# Altium PCB STLinkV2_1.PcbDoc (part 1 of 2)
Units mm, origin at the board's own origin, x right, y up, seen from the top; angles counter-clockwise.
Board outline 37 x 14 mm, 4 copper layers (Top Layer, GND, Layer 2, Bottom Layer), stack 1.587 mm thick; 49 components, 42 nets, 180 pads, 75 vias.
Unrouted connection lines stored in the file: 1.
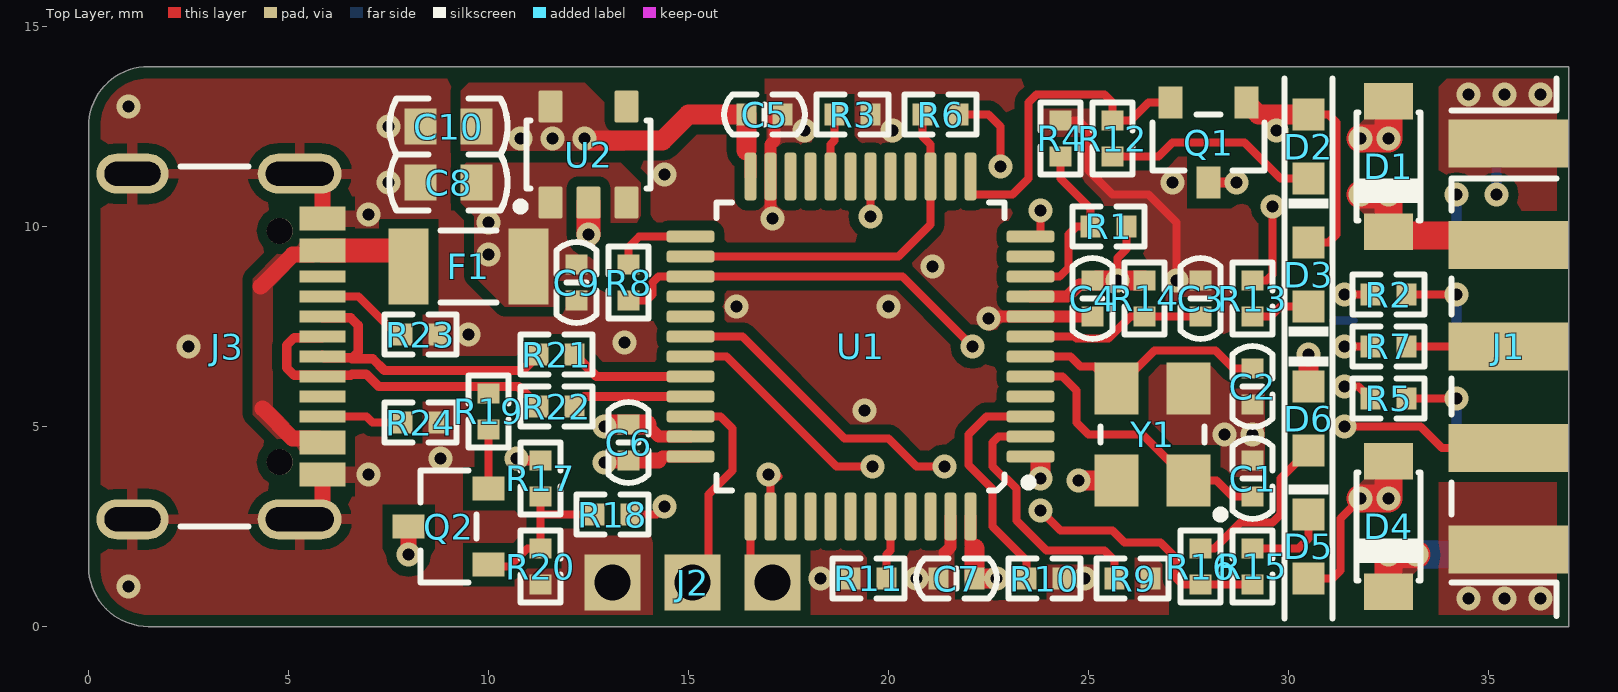
[diagram p0: Top Layer view]
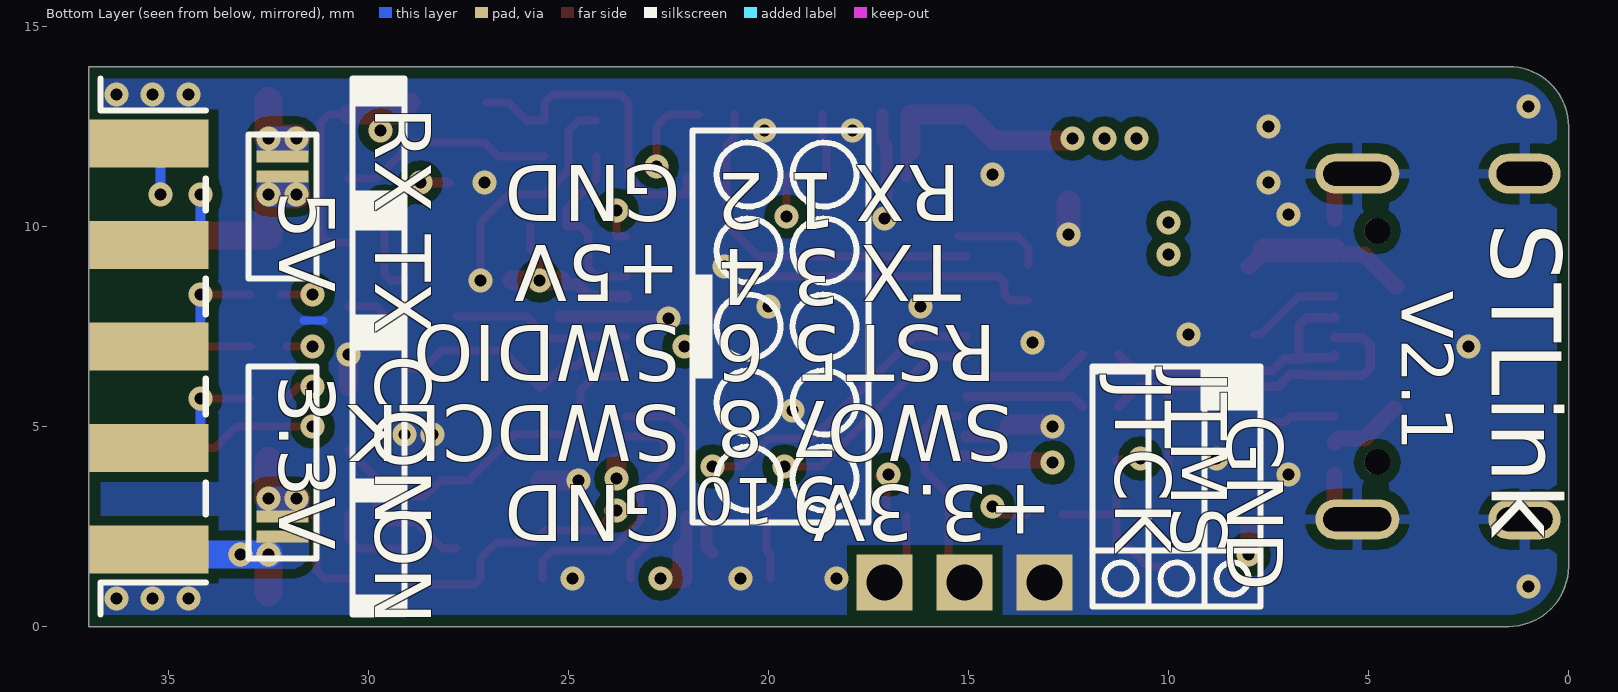
[diagram p1: Bottom Layer view, seen from below]
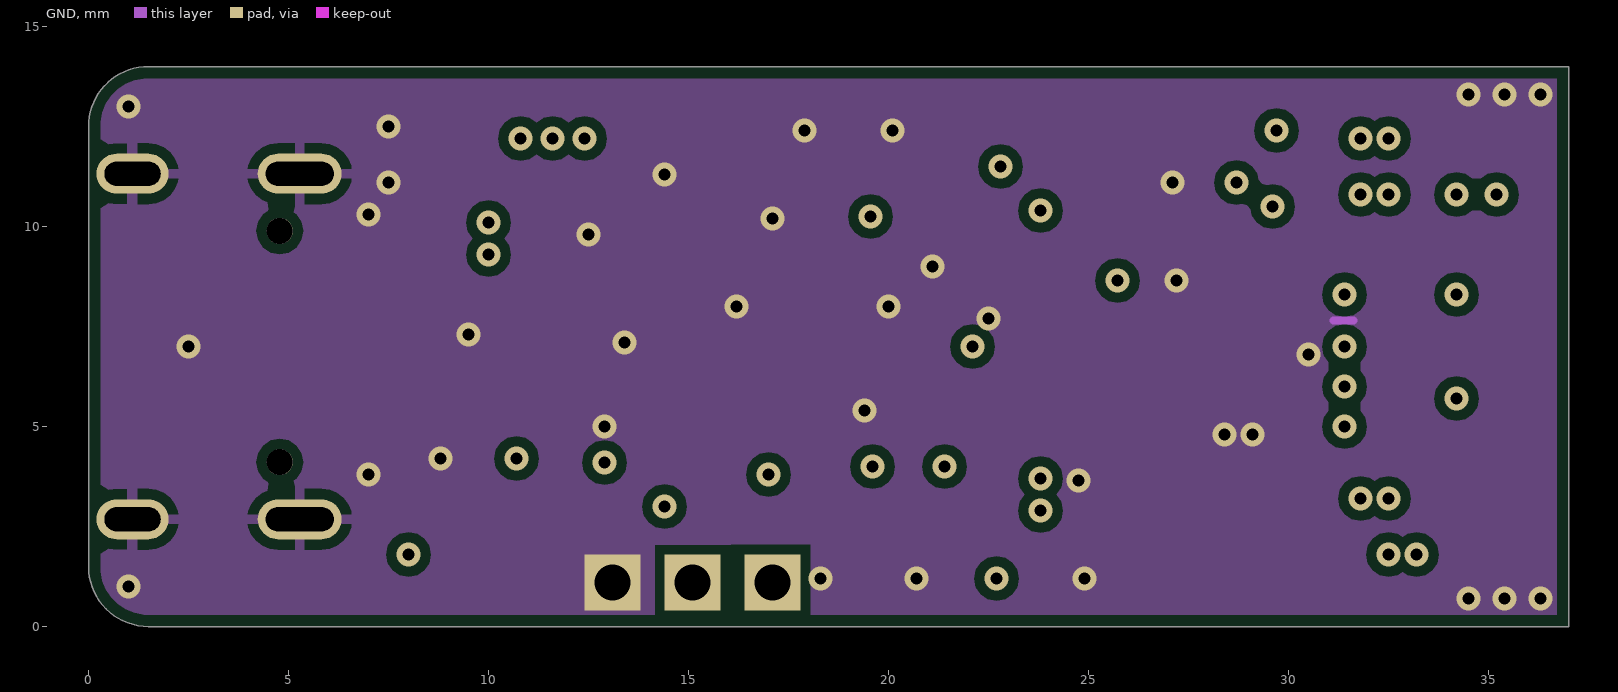
[diagram p2: GND]
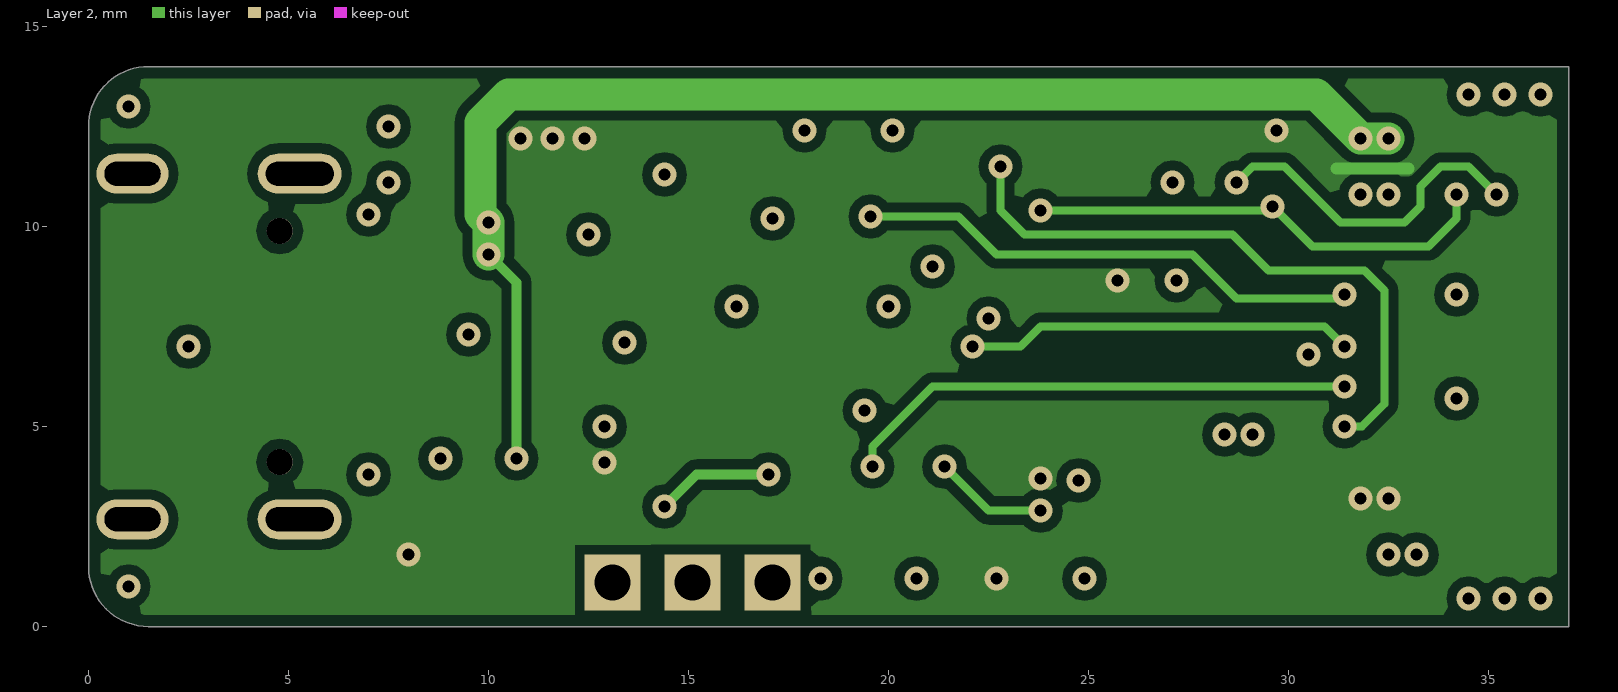
[diagram p3: Layer 2]
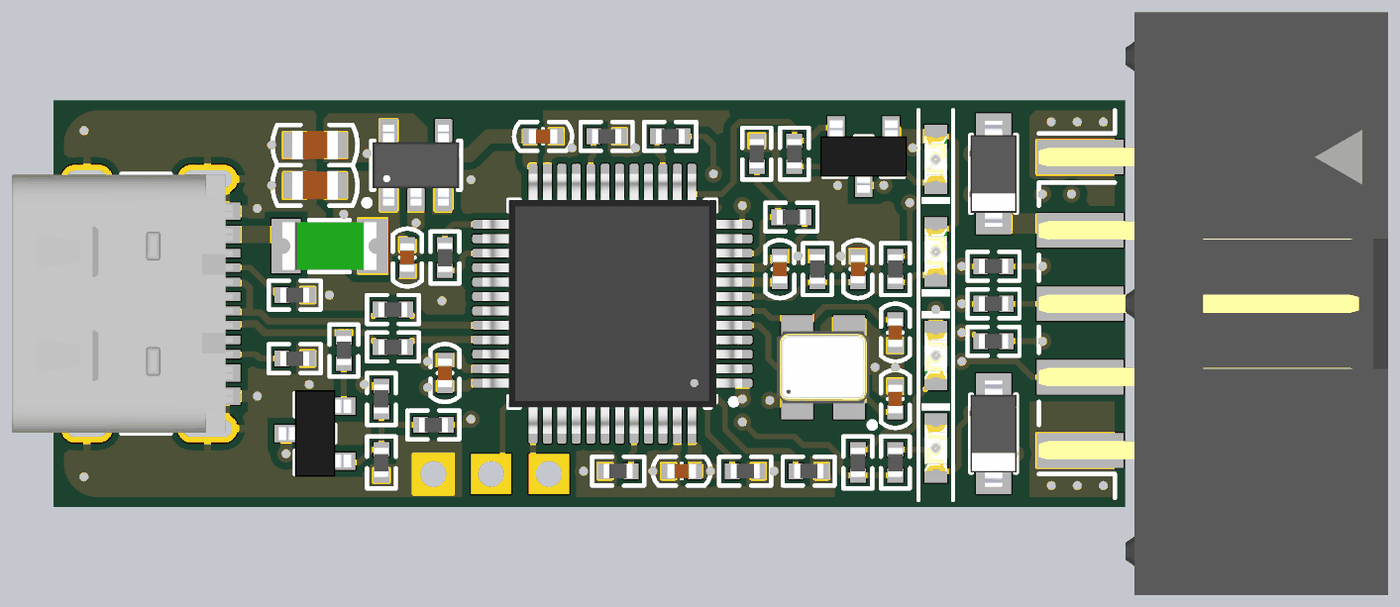
[diagram p4: 3D render of the assembled board from above, using the file's embedded part models]

## Layer stack, top to bottom
Top Solder: solder mask 0.0102, Solder Resist, Dk 3.5
Top Layer: signal copper 0.0356
Dielectric 2: prepreg 0.21, PP-006, Dk 4.4
GND: signal copper 0.0152
Dielectric 1: dielectric 1.065, FR-4, Dk 4.6
Layer 2: signal copper 0.0152
Dielectric 3: prepreg 0.21, PP-006, Dk 4.4
Bottom Layer: signal copper 0.0356
Bottom Solder: solder mask 0.0102, Solder Resist, Dk 3.5

## Board outline
0,1.5 ccw(c1.5,1.5) 1.5,0 37,0 37,14 1.5,14 ccw(c1.5,12.5) 0,12.5

## Design rules (kind name [scope] priority, off if disabled: settings)
Clearance Clearance_1 [InNet('+3V3_PIN')] p1 off: gap=0.2 ignorepadtopadclearanceinfootprint=FALSE except(0.1: Arc-THPad Arc-Hole Track-THPad Track-Hole SMDPad-THPad; 0.15: Arc-Arc Arc-Track Track-Track SMDPad-Hole Fill-Hole Poly-Hole Region-Hole)
Clearance [All] p2: gap=0.25 ignorepadtopadclearanceinfootprint=FALSE except(0.1: Arc-THPad Arc-Hole Track-THPad Track-Hole SMDPad-THPad; 0.15: Arc-Arc Arc-Track Track-Track SMDPad-Hole Fill-Hole Poly-Hole Region-Hole; 0.2: Arc-SMDPad Arc-Via Arc-Text Track-SMDPad Track-Via Track-Text SMDPad-SMDPad SMDPad-Via SMDPad-Text THPad-THPad THPad-Via THPad-Text THPad-Hole Via-Via Via-Text Via-Hole Fill-Text Poly-Text Region-Text Text-Text Text-Hole)
ComponentClearance [All] p1: gap=-10 collisioncheckmode=3 verticalgap=-10 showdistances=FALSE
DiffPairsRouting [All] p1: maxlimit=0.15 minlimit=0.127 mostfreqgap=0.15 toplayer_minwidth=0.236 toplayer_maxwidth=0.264 toplayer_prefwidth=0.264 midlayer1_maxgap=0.127 midlayer1_prefgap=0.127 midlayer1_minwidth=0.148 midlayer1_maxwidth=0.148 midlayer1_prefwidth=0.148 midlayer2_maxgap=0.127 midlayer2_prefgap=0.127 midlayer2_minwidth=0.148 midlayer2_maxwidth=0.148 midlayer2_prefwidth=0.148 bottomlayer_minwidth=0.236 bottomlayer_maxwidth=0.264 bottomlayer_prefwidth=0.264 impedanceprofiledriven=TRUE impedanceprofileid={6837B7C3-B196-4AB3-86C8-2EA95904B1C1} impedanceprofilevalue=90.000000 maxuncoupledlength=12.7
PlaneConnect [All] p1: planeconnectstyle=Direct reliefexpansion=0.508 reliefentries=4 reliefconductorwidth=0.254 reliefairgap=0.254
PolygonConnect [All] p1: connectstyle=Direct reliefconductorwidth=0.254 reliefentries=4 polygonreliefangle="90 Angle" airgapwidth=0.254
RoomDefinition [02]-STLinkV2_1 [InComponentClass('[02]-STLinkV2_1')] p1: confinementstyle=ConfineIn formatcopy=TRUE lockcomponents=FALSE outline -221,-158 -170.2,-158 -170.2,-132.6 -221,-132.6
RoutingVias [All] p1: holewidth=0.3 width=0.6 viastyle="Through Hole" minholewidth=0.1 minwidth=0.2 maxholewidth=6 maxwidth=10
SilkToSilkClearance [All] p1: silktosilkclearance=0.15
SilkToSolderMaskClearance [IsPad] p1: minsilkscreentomaskgap=0.1 clearancetoexposedcopper=TRUE
SolderMaskExpansion [All] p1: expansion=0.05
Width [All] p1: maxlimit=10 minlimit=0.1 preferedwidth=0.2 minimp=50.000000 maximp=50.000000 favimp=50.000000
25 further rules are at their usual default settings.

## Classes and differential pairs
differential pair class DIFF_USB: USB
differential pair class USB: J USB
differential pair J: +J_P -J_N
differential pair USB: +USB_P -USB_N

## Components (designator, comment, footprint, x,y, rotation, side; value= is the part's Value field where it differs from the comment)
C1 "10pF" CAPC1005X55N 29.1,3.7 r270 top
C2 "10pF" CAPC1005X55N 29.1,6 r90 top
C3 "100n" CAPC1005X55N 27.8,8.2 r90 top
C4 "100n" CAPC1005X55N 25.1,8.2 r270 top
C5 "100n" CAPC1005X55N 16.9,12.8 r0 top
C6 "100n" CAPC1005X55N 13.5,4.6 r90 top
C7 "100n" CAPC1005X55N 21.7,1.2 r180 top
C8 "10u" CAPC0603(1608METRIC)L 9,11.1 r180 top
C9 "100n" CAPC1005X55N 12.2,8.6 r270 top
C10 "10u" CAPC0603(1608METRIC)L 9,12.5 r180 top
D1 "MBR0520LT1G" SOD3716X135N 32.5,11.5 r270 top
D2 "YELLOW" WL-SMCW_0603_150060XX75003 30.5,12 r270 top
D3 "GREEN" WL-SMCW_0603_150060XX75003 30.5,8.8 r270 top
D4 "MBR0520LT1G" SOD3716X135N 32.5,2.5 r270 top
D5 "GREEN" WL-SMCW_0603_150060XX75003 30.5,2 r90 top
D6 "RED" WL-SMCW_0603_150060xx75003 30.5,5.2 r90 top
F1 "0ZCJ0050AF2E" 0ZCJ_BEL 9.5,9 r0 top
J1 "SBH11-PBPC-D05-ST-BK" SULLINS_SBH11-PBPC-D05-ST-BK-H 35.5,7 r270 top locked
J2 "CON_3_2.00" PIN3 13.1,1.1 r0 top
J3 "JACK-USBC-163SMT-4BLS1735" JACK-USBC-163SMT-4BLS1735 1.1,7 r270 top
Q1 "2N7002" SOT23-3 28,12.1 r180 top
Q2 "MMS9013-L-TP" SOT23-3 9,2.5 r90 top
R1 "5k1" RESC1005X37N 25.5,10 r0 top
R2 "22R" RESC1005X37N 32.5,8.3 r180 top
R3 "100k" RESC1005X37N 19.1,12.8 r180 top
R4 "5k1" RESC1005X37N 24.3,12.2 r90 top
R5 "22R" RESC1005X37N 32.5,5.7 r180 top
R6 "22R" RESC1005X37N 21.3,12.8 r180 top
R7 "22R" RESC1005X37N 32.5,7 r180 top
R8 "100R" RESC1005X37N 13.5,8.6 r270 top
R9 "10k" RESC1005X37N 26.1,1.2 r0 top
R10 "10k" RESC1005X37N 23.9,1.2 r0 top
R11 "100k" RESC1005X37N 19.5,1.2 r180 top
R12 "100R" RESC1005X37N 25.6,12.2 r90 top
R13 "100R" RESC1005X37N 29.1,8.2 r90 top
R14 "100k" RESC1005X37N 26.4,8.2 r90 top
R15 "1k" RESC1005X37N 29.1,1.5 r270 top
R16 "1k" RESC1005X37N 27.8,1.5 r270 top
R17 "10k" RESC1005X37N 11.3,3.7 r270 top
R18 "100R" RESC1005X37N 13.1,2.8 r0 top
R19 "1k5" RESC1005X37N 10,5.38 r90 top
R20 "36k" RESC1005X37N 11.3,1.5 r270 top
R21 "10R" RESC1005X37N 11.7,6.8 r180 top
R22 "10R" RESC1005X37N 11.7,5.5 r180 top
R23 "5k1" RESC1005X37N 8.3,7.3 r0 top
R24 "5k1" RESC1005X37N 8.3,5.1 r0 top
U1 "STM32F103CBT6TR" QFP50P900X900X160-48N 19.3,7 r180 top
U2 "AP2112K-3.3TRG1" SOT95P285X140-5N 12.5,11.8 r90 top
Y1 "ECS-80-10-33-CKM-TR3" XTAL_C3E-8.000-8-1015-R 26.6,4.8 r180 top value="8 MHz"

## Footprints (in the part's own frame and the unit in brackets; to place one, negate y for a bottom-side part, rotate by r counter-clockwise, add the part's x,y. Pads: shape width x height; smd on the part's side, far side on the other; paste and mask are expansions set on the pad)
0ZCJ_BEL [mm]
  rect 1x1.9 smd: 1(-1.5,0) 2(1.5,0)
  silkscreen extent -0.7,-0.9 0.7,0.9, body extent -1.62,-0.82 1.63,0.83, height 0.87
CAPC0603(1608METRIC)L [mm] "Chip Capacitor, Body 1.6x0.8mm, IPC High Density"
  rect 0.8x0.9 smd: 1(0.7,0) 2(-0.7,0)
  silkscreen extent -1.47,-0.7 1.47,0.7, body extent -0.8,-0.5 0.8,0.5, height 0.8
CAPC1005X55N [mm]
  rect 0.5x0.55 smd: 1(-0.45,0) 2(0.45,0)
  silkscreen extent -1.01,-0.5 1.01,0.5, body extent -0.5,-0.25 0.5,0.25, height 0.55
JACK-USBC-163SMT-4BLS1735 [mm]
  round 0.65 hole 0.65 unplated: 0(-2.89,3.68) 0(2.89,3.68)
  rect 0.6x1.15 smd: A1B12(-3.2,4.745) A4B9(-2.4,4.745) B1A12(3.2,4.745) B4A9(2.4,4.745)
  rect 0.3x1.15 smd: A5(-1.25,4.745) A6(-0.25,4.745) A7(0.25,4.745) A8(1.25,4.745) B5(1.75,4.745) B6(0.75,4.745) B7(-0.75,4.745) B8(-1.75,4.745)
  oval 1x1.8 hole 0.6 slot 1.4 at 90 deg: SH1(-4.32,0) SH2(4.32,0)
  oval 1x2.1 hole 0.6 slot 1.7 at 90 deg: SH3(-4.32,4.18) SH4(4.32,4.18)
  silkscreen extent -4.5,1.2 4.5,2.9, body extent -4.47,-2.6 4.47,5.05, height 3.26
PIN3 [mm]
  rect 1.4x1.4 hole 0.9: 1(0,0) 2(2,0) 3(4,0)
QFP50P900X900X160-48N [mm]
  rrect50% 1.2x0.3 smd: 1(-4.25,2.75) 2(-4.25,2.25) 3(-4.25,1.75) 4(-4.25,1.25) 5(-4.25,0.75) 6(-4.25,0.25) 7(-4.25,-0.25) 8(-4.25,-0.75) 9(-4.25,-1.25) 10(-4.25,-1.75) 11(-4.25,-2.25) 12(-4.25,-2.75) 25(4.25,-2.75) 26(4.25,-2.25) 27(4.25,-1.75) 28(4.25,-1.25) 29(4.25,-0.75) 30(4.25,-0.25) 31(4.25,0.25) 32(4.25,0.75) 33(4.25,1.25) 34(4.25,1.75) 35(4.25,2.25) 36(4.25,2.75)
  rrect50% 0.3x1.2 smd: 13(-2.75,-4.25) 14(-2.25,-4.25) 15(-1.75,-4.25) 16(-1.25,-4.25) 17(-0.75,-4.25) 18(-0.25,-4.25) 19(0.25,-4.25) 20(0.75,-4.25) 21(1.25,-4.25) 22(1.75,-4.25) 23(2.25,-4.25) 24(2.75,-4.25) 37(2.75,4.25) 38(2.25,4.25) 39(1.75,4.25) 40(1.25,4.25) 41(0.75,4.25) 42(0.25,4.25) 43(-0.25,4.25) 44(-0.75,4.25) 45(-1.25,4.25) 46(-1.75,4.25) 47(-2.25,4.25) 48(-2.75,4.25)
  silkscreen extent -4.3,-3.6 3.6,3.6, body extent -4.5,-4.5 4.5,4.5, height 1.6
RESC1005X37N [mm]
  rect 0.5x0.55 smd: 1(-0.45,0) 2(0.45,0)
  silkscreen extent -0.9,-0.5 0.9,0.5, body extent -0.5,-0.25 0.5,0.25, height 0.4
SOD3716X135N [mm]
  rect 0.91x1.22 smd: 1(-1.635,0) 2(1.635,0)
  silkscreen extent -1.35,-0.8 1.35,0.8, body extent -1.84,-0.8 1.84,0.8, height 1.35
SOT23-3 [mm]
  rect 0.6x0.8 smd: 1(-0.95,-1) 2(0.95,-1) 3(0,1)
  silkscreen extent -1.4,-0.7 1.4,0.7, body extent -1.5,-1.25 1.5,1.25, height 1.07
SOT95P285X140-5N [mm]
  rrect15% 0.8x0.6 smd: 1(-1.2,0.95) 2(-1.2,0) 3(-1.2,-0.95) 4(1.2,-0.95) 5(1.2,0.95)
  silkscreen extent -1.4,-1.55 0.85,1.8, body extent -1.4,-1.5 1.4,1.5, height 1.4
SULLINS_SBH11-PBPC-D05-ST-BK-H [mm]
  rect 1.2x3 smd: 1(-5.08,0) 3(-2.54,0) 5(0,0) 7(2.54,0) 9(5.08,0)
  rect 1.2x3 smd far side: 2(-5.08,0) 4(-2.54,0) 6(0,0) 8(2.54,0) 10(5.08,0)
  silkscreen extent -6.7,-1.43 6.73,1.2, body extent -10.1,-1.43 10.1,10.66, height 3.49
WL-SMCW_0603_150060XX75003 [mm] "SMD Mono-color Chip LED, body 1.6x0.8mm"
  rect 0.8x0.8 smd: 1(-0.8,0) 2(0.8,0)
  silkscreen extent 1.3,-0.5 1.55,0.5, body extent -0.8,-0.4 0.8,0.4, height 0.7
WL-SMCW_0603_150060xx75003 [mm] "SMD Mono-color Chip LED, body 1.6x0.8mm"
  rect 0.8x0.8 smd: 1(-0.8,0) 2(0.8,0)
  silkscreen extent 1.3,-0.5 1.55,0.5, body extent -0.8,-0.4 0.8,0.4, height 0.7
XTAL_C3E-8.000-8-1015-R [mm]
  rect 1.1x1.3 smd: 1(-0.9,1.15) 2(-0.9,-1.15) 3(0.9,-1.15) 4(0.9,1.15)
  silkscreen extent -1.8,-0.2 1.3,2.1, body extent -1.25,-1.6 1.25,1.6, height 0.78

## Part data
C1 C2: library part CAP_GCM1555C1H100JA16D, "50V 10pF C0G ±5% 0402 Multilayer Ceramic Capacitors MLCC - SMD/SMT ROHS", Case/Package=0402, Case Code (Metric)=1005, Dielectric=C0G, Dielectric Material=Ceramic, Manufacturer 1=Murata, Manufacturer Lifecycle Status="IN PRODUCTION", Manufacturer Part Number 1=GCM1555C1H100JA16D, Max Operating Temperature=125°C, Min Operating Temperature=-55°C, Ratings=AEC-Q200, Supplier Part Number 1=490-10668-1-ND, Temperature Coefficient=30ppm/°C, TOLERANCE=5%, Voltage Rating=50V, Capacitance=10pF, Case Code (Imperial)=0402, ComponentLink1Description=https://datasheet.octopart.com:443/GCM1555C1H100JA16D-Murata-datasheet-149522303.pdf?src-supplier=Farnell, ComponentLink1URL=https://datasheet.octopart.com:443/GCM1555C1H100JA16D-Murata-datasheet-149522303.pdf?src-supplier=Farnell, ComponentLink2Description=https://datasheet.octopart.com:443/GCM1555C1H100JA16D-Murata-datasheet-46741789.pdf?src-supplier=element14+APAC, ComponentLink2URL=https://datasheet.octopart.com:443/GCM1555C1H100JA16D-Murata-datasheet-46741789.pdf?src-supplier=element14+APAC, ComponentLink3Description=https://datasheet.octopart.com:443/GCM1555C1H100JA16D-Murata-datasheet-140655912.pdf?src-supplier=Ciiva, ComponentLink3URL=https://datasheet.octopart.com:443/GCM1555C1H100JA16D-Murata-datasheet-140655912.pdf?src-supplier=Ciiva, ComponentLink4Description=https://datasheet.octopart.com:443/GCM1555C1H100JA16D-Murata-datasheet-138715603.pdf?src-supplier=Ciiva, ComponentLink4URL=https://datasheet.octopart.com:443/GCM1555C1H100JA16D-Murata-datasheet-138715603.pdf?src-supplier=Ciiva, ComponentLink5Description=https://datasheet.octopart.com:443/GCM1555C1H100JA16D-Murata-datasheet-118179445.pdf?src-supplier=Future+Electronics, ComponentLink5URL=https://datasheet.octopart.com:443/GCM1555C1H100JA16D-Murata-datasheet-118179445.pdf?src-supplier=Future+Electronics, ComponentLink6Description=https://datasheet.octopart.com:443/GCM1555C1H100JA16D-Murata-datasheet-12532847.pdf?src-supplier=Future+Electronics, ComponentLink6URL=https://datasheet.octopart.com:443/GCM1555C1H100JA16D-Murata-datasheet-12532847.pdf?src-supplier=Future+Electronics, ComponentLink7Description=https://datasheet.octopart.com:443/GCM1555C1H100JA16D-Murata-datasheet-34148896.pdf?src-supplier=Future+Electronics, ComponentLink7URL=https://datasheet.octopart.com:443/GCM1555C1H100JA16D-Murata-datasheet-34148896.pdf?src-supplier=Future+Electronics, ComponentLink8Description=https://datasheet.octopart.com:443/GCM1555C1H100JA16D-Murata-datasheet-44780974.pdf?src-supplier=Future+Electronics, ComponentLink8URL=https://datasheet.octopart.com:443/GCM1555C1H100JA16D-Murata-datasheet-44780974.pdf?src-supplier=Future+Electronics, ComponentLink9Description=https://datasheet.octopart.com:443/GCM1555C1H100JA16D-Murata-datasheet-12511495.pdf?src-supplier=TME, ComponentLink9URL=https://datasheet.octopart.com:443/GCM1555C1H100JA16D-Murata-datasheet-12511495.pdf?src-supplier=TME, ComponentLink10Description=http://sigma.octopart.com:80/reach_statement/Murata-company-16.pdf?src-supplier=Compliance+Statements, ComponentLink10URL=http://sigma.octopart.com:80/reach_statement/Murata-company-16.pdf?src-supplier=Compliance+Statements, Export Control Classification Number (ECCN) Code=EAR99, Harmonized Tariff Schedule (HTS) Code=8532.24.00.20, Height=500µm, Introduction Date=2013-11-20, Lead Free="Lead Free", Length=1mm, Lifecycle Status=Production, Material=Ceramic, Mount="Surface Mount", Number of Terminals=2, Pricing 1="1=0,1, 10=0,027, 50=0,0178, 100=0,0152, 500=0,0107, 1000=0,00935, 2500=0,00792, 5000=0,00706 (USD)", REACH SVHC=Yes, RoHS=Compliant, Schedule B="8532240020, 8532240020|8532240020, 8532240020|8532240020|8532240020, 8532240020|8532240020|8532240020|8532240020", Stock 1=360236, Supplier 1=DigiKey, Termination=SMD/SMT, Voltage Rating (DC)=50V, Weight=6.010099mg, Width=500µm
C3 C4 C5 C6 C7 C9: library part CAP_GCM155R71H104KE02D, "50V 100nF X7R ±10% 0402 Multilayer Ceramic Capacitors MLCC - SMD/SMT ROHS", Capacitance=100nF, Case/Package=0402, Case Code (Metric)=1005, Dielectric=X7R, Dielectric Material=Ceramic, Manufacturer 1=Murata, Manufacturer Lifecycle Status="IN PRODUCTION", Manufacturer Part Number 1=GCM155R71H104KE02D, Max Operating Temperature=125°C, Min Operating Temperature=-55°C, Ratings=AEC-Q200, Supplier Part Number 1=490-10672-1-ND, TOLERANCE=10%, Voltage Rating=50V, Case Code (Imperial)=0402, ComponentLink1Description=https://datasheet.octopart.com:443/GCM155R71H104KE02D-Murata-datasheet-149522465.pdf?src-supplier=Farnell, ComponentLink1URL=https://datasheet.octopart.com:443/GCM155R71H104KE02D-Murata-datasheet-149522465.pdf?src-supplier=Farnell, ComponentLink2Description=https://datasheet.octopart.com:443/GCM155R71H104KE02D-Murata-datasheet-66077033.pdf?src-supplier=element14+APAC, ComponentLink2URL=https://datasheet.octopart.com:443/GCM155R71H104KE02D-Murata-datasheet-66077033.pdf?src-supplier=element14+APAC, ComponentLink3Description=https://datasheet.octopart.com:443/GCM155R71H104KE02D-Murata-datasheet-165579661.pdf?src-supplier=TME, ComponentLink3URL=https://datasheet.octopart.com:443/GCM155R71H104KE02D-Murata-datasheet-165579661.pdf?src-supplier=TME, ComponentLink4Description=https://datasheet.octopart.com:443/GCM155R71H104KE02D-Murata-datasheet-141266224.pdf?src-supplier=Ciiva, ComponentLink4URL=https://datasheet.octopart.com:443/GCM155R71H104KE02D-Murata-datasheet-141266224.pdf?src-supplier=Ciiva, ComponentLink5Description=https://datasheet.octopart.com:443/GCM155R71H104KE02D-Murata-datasheet-140656751.pdf?src-supplier=Ciiva, ComponentLink5URL=https://datasheet.octopart.com:443/GCM155R71H104KE02D-Murata-datasheet-140656751.pdf?src-supplier=Ciiva, ComponentLink6Description=https://datasheet.octopart.com:443/GCM155R71H104KE02D-Murata-datasheet-138716456.pdf?src-supplier=Ciiva, ComponentLink6URL=https://datasheet.octopart.com:443/GCM155R71H104KE02D-Murata-datasheet-138716456.pdf?src-supplier=Ciiva, ComponentLink7Description=https://datasheet.octopart.com:443/GCM155R71H104KE02D-Murata-datasheet-12524712.pdf?src-supplier=Future+Electronics, ComponentLink7URL=https://datasheet.octopart.com:443/GCM155R71H104KE02D-Murata-datasheet-12524712.pdf?src-supplier=Future+Electronics, ComponentLink8Description=http://sigma.octopart.com:80/reach_statement/Murata-company-16.pdf?src-supplier=Compliance+Statements, ComponentLink8URL=http://sigma.octopart.com:80/reach_statement/Murata-company-16.pdf?src-supplier=Compliance+Statements, Height=500µm, Lead Free="Lead Free", Length=1mm, Lifecycle Status=Production, Material=Ceramic, Mount="Surface Mount", Number of Terminals=2, Pricing 1="1=0,1, 10=0,032, 50=0,0216, 100=0,0184, 500=0,01308, 1000=0,01147, 2500=0,00978, 5000=0,00876 (USD)", REACH SVHC=Yes, RoHS=Compliant, Schedule B="8532240020, 8532240020|8532240020, 8532240020|8532240020|8532240020, 8532240020|8532240020|8532240020|8532240020", Stock 1=10014269, Supplier 1=DigiKey, Termination=SMD/SMT, Voltage Rating (DC)=50V, Weight=6.010099mg, Width=500µm
C8 C10: library part GRM188C81C106MA73D, "CAP CER 10UF 6.3V X7R 0603", PACKAGE=0603, TEMP COEFFICIENT=X6S, TOLERANCE=20%, Voltage=16V, BOM NOTE=-, MFG="Murata Electronics", MFG PART NUMBER=GRM188C81C106MA73D, PART DESCRIPTION="10 µF ±20% 16V Ceramic Capacitor X6S 0603 (1608 Metric)", PART SUPPLIER LINK 1=https://www.digikey.com/en/products/detail/murata-electronics/GRM188C81C106MA73D/3900463, PART TYPE=Capacitor
D1 D4: "Diode, Schottky Barrier, Vr 20V, If 0.5A, Pkg SOD-123, Vf 0.385V, Tj +125DEGC, Cs 5.5A", Average Rectified Current=500mA, Breakdown Voltage=20V, Case/Package=SOD-123-2, Forward Voltage=385mV, Manufacturer 1=onsemi, Manufacturer Lifecycle Status=ACTIVE, Max Forward Surge Current (Ifsm)=5.5A, Max Junction Temperature (Tj)=125°C, Max Reverse Leakage Current=250µA, Min Operating Temperature=-65°C, Supplier Part Number 1=MBR0520LT1GOSDKR-ND, China RoHS=Compliant, ComponentLink1Description=https://datasheet.octopart.com:443/MBR0520LT1G-ON-Semiconductor-datasheet-11779391.pdf?src-supplier=Newark, ComponentLink1URL=https://datasheet.octopart.com:443/MBR0520LT1G-ON-Semiconductor-datasheet-11779391.pdf?src-supplier=Newark, ComponentLink2Description=https://datasheet.octopart.com:443/MBR0520LT1G-onsemi-datasheet-181959022.pdf?src-supplier=Newark, ComponentLink2URL=https://datasheet.octopart.com:443/MBR0520LT1G-onsemi-datasheet-181959022.pdf?src-supplier=Newark, ComponentLink3Description=https://datasheet.octopart.com:443/MBR0520LT1G-onsemi-datasheet-180961579.pdf?src-supplier=IHS, ComponentLink3URL=https://datasheet.octopart.com:443/MBR0520LT1G-onsemi-datasheet-180961579.pdf?src-supplier=IHS, ComponentLink4Description=https://datasheet.octopart.com:443/MBR0520LT1G-ON-Semiconductor-datasheet-7553569.pdf?src-supplier=Upverter, ComponentLink4URL=https://datasheet.octopart.com:443/MBR0520LT1G-ON-Semiconductor-datasheet-7553569.pdf?src-supplier=Upverter, ComponentLink5Description=https://sigma.octopart.com:443/138897866/technical_drawing/ON-Semiconductor-MBR0520LT1G.pdf?src-supplier=Upverter, ComponentLink5URL=https://sigma.octopart.com:443/138897866/technical_drawing/ON-Semiconductor-MBR0520LT1G.pdf?src-supplier=Upverter, ComponentLink6Description=https://datasheet.octopart.com:443/MBR0520LT1G-onsemi-datasheet-178031877.pdf?src-supplier=Burklin+Elektronik, ComponentLink6URL=https://datasheet.octopart.com:443/MBR0520LT1G-onsemi-datasheet-178031877.pdf?src-supplier=Burklin+Elektronik, ComponentLink7Description=https://datasheet.octopart.com:443/MBR0520LT1G-ON-Semiconductor-datasheet-127372316.pdf?src-supplier=TME, ComponentLink7URL=https://datasheet.octopart.com:443/MBR0520LT1G-ON-Semiconductor-datasheet-127372316.pdf?src-supplier=TME, ComponentLink8Description=https://datasheet.octopart.com:443/MBR0520LT1G-ON-Semiconductor-datasheet-41281291.pdf?src-supplier=Seeed+Studio, ComponentLink8URL=https://datasheet.octopart.com:443/MBR0520LT1G-ON-Semiconductor-datasheet-41281291.pdf?src-supplier=Seeed+Studio, ComponentLink9Description=https://datasheet.octopart.com:443/MBR0520LT1G-ON-Semiconductor-datasheet-9925139.pdf?src-supplier=RS+(Formerly+Allied+Electronics), ComponentLink9URL=https://datasheet.octopart.com:443/MBR0520LT1G-ON-Semiconductor-datasheet-9925139.pdf?src-supplier=RS+(Formerly+Allied+Electronics), ComponentLink10Description=http://sigma.octopart.com:80/150613958/rohs_statement/ON-Semiconductor-MBR0520LT1G.pdf?src-supplier=Compliance+Statements, ComponentLink10URL=http://sigma.octopart.com:80/150613958/rohs_statement/ON-Semiconductor-MBR0520LT1G.pdf?src-supplier=Compliance+Statements, ComponentLink11Description=http://sigma.octopart.com:80/reach_statement/ON-Semiconductor-company-79.pdf?src-supplier=Compliance+Statements, ComponentLink11URL=http://sigma.octopart.com:80/reach_statement/ON-Semiconductor-company-79.pdf?src-supplier=Compliance+Statements, ComponentLink12Description=http://sigma.octopart.com:80/rohs_statement/Fairchild-Semiconductor-company-11.pdf?src-supplier=Compliance+Statements, ComponentLink12URL=http://sigma.octopart.com:80/rohs_statement/Fairchild-Semiconductor-company-11.pdf?src-supplier=Compliance+Statements, ComponentLink13Description=http://sigma.octopart.com:80/rohs_statement/Fairchild-Semiconductor-company-10.pdf?src-supplier=Compliance+Statements, ComponentLink13URL=http://sigma.octopart.com:80/rohs_statement/Fairchild-Semiconductor-company-10.pdf?src-supplier=Compliance+Statements, ComponentLink14Description=http://sigma.octopart.com:80/reach_statement/Fairchild-Semiconductor-company-9.pdf?src-supplier=Compliance+Statements, ComponentLink14URL=http://sigma.octopart.com:80/reach_statement/Fairchild-Semiconductor-company-9.pdf?src-supplier=Compliance+Statements, ComponentLink15Description=https://octopart.com:443/opatz8j6/c1?t=_YjQqLKsC65BFvK1_6UEnwkfXAH7KQR0AUtjQhBbgRcCg4G01S1s7qEN-APRdTq2QxXn1UUlKQRo_8YaIh_9VKpIfqHX6gOCONHURfwzH6xXAs9QBLkjiHNMlU-lF7qP-hjNkNERQ_k0kIA2p9qebgDdvTYghquJ2ZyH6YsgiUFZY5VMTUw-sdciFu9LUViUlipbx-n_nEcjMQdjF64MNq6xlfh4VgxvMgvBpPYsY9qgcJnzVRziJeVk76fVr6xE-wMFazzuDiOLkTxZV3gsIM-ts8FvcqA94y80ziAYgBJFbAZoRbZHPUojn3xAN_DZBogCra4-6Hj4KsUUClm2Wd8ViyY7UTH0NpE-&src-supplier=Compliance+Statements, ComponentLink15URL=https://octopart.com:443/opatz8j6/c1?t=_YjQqLKsC65BFvK1_6UEnwkfXAH7KQR0AUtjQhBbgRcCg4G01S1s7qEN-APRdTq2QxXn1UUlKQRo_8YaIh_9VKpIfqHX6gOCONHURfwzH6xXAs9QBLkjiHNMlU-lF7qP-hjNkNERQ_k0kIA2p9qebgDdvTYghquJ2ZyH6YsgiUFZY5VMTUw-sdciFu9LUViUlipbx-n_nEcjMQdjF64MNq6xlfh4VgxvMgvBpPYsY9qgcJnzVRziJeVk76fVr6xE-wMFazzuDiOLkTxZV3gsIM-ts8FvcqA94y80ziAYgBJFbAZoRbZHPUojn3xAN_DZBogCra4-6Hj4KsUUClm2Wd8ViyY7UTH0NpE-&src-supplier=Compliance+Statements, ComponentLink16Description=https://octopart.com:443/opatz8j6/c1?t=465MS6kK7cso_W2dWapH1mwugolUieMrJ6T8zH1kmzm4_X9ivAN38YPFckio7psQS8nb0y8GaMgcsjpTEVjVFlqaa1naUWp6vBVHW5EhU-_VxxIgVrU4nMQA3_0Mqzco5Yod9y9U29cn2w3eNtdtML414xSFEkkQp3vLZgwv5e3p3sPIG7iVZSC5cxI-QwztRS1CwUW0gZ0Pzn3BpFoj-jzdQ6bC_nr0LdqYIQTJjjCGhTSYPxbUt5ip7EEgJhUucOCa39zSMmEBeIdXKchgLH2Rj25NMoKiuINMY1uhwn7UPETgW0-6uucpjhPoe9C5c1Xf4rs0iSwfvb7ymc0hqIZPVft-ekS-NDo&src-supplier=Compliance+Statements, ComponentLink16URL=https://octopart.com:443/opatz8j6/c1?t=465MS6kK7cso_W2dWapH1mwugolUieMrJ6T8zH1kmzm4_X9ivAN38YPFckio7psQS8nb0y8GaMgcsjpTEVjVFlqaa1naUWp6vBVHW5EhU-_VxxIgVrU4nMQA3_0Mqzco5Yod9y9U29cn2w3eNtdtML414xSFEkkQp3vLZgwv5e3p3sPIG7iVZSC5cxI-QwztRS1CwUW0gZ0Pzn3BpFoj-jzdQ6bC_nr0LdqYIQTJjjCGhTSYPxbUt5ip7EEgJhUucOCa39zSMmEBeIdXKchgLH2Rj25NMoKiuINMY1uhwn7UPETgW0-6uucpjhPoe9C5c1Xf4rs0iSwfvb7ymc0hqIZPVft-ekS-NDo&src-supplier=Compliance+Statements, Contact Plating=Tin, Current Rating=500mA, Element Configuration=Single, Forward Current=500mA, Height=1.35mm, Lead Free="Lead Free", Length=2.69mm, Lifecycle Status=Production, Manufacturer Part Number 1=MBR0520LT1G, Max Operating Temperature=125°C, Max Output Current=500mA, Max Repetitive Reverse Voltage (Vrrm)=20V, Max Reverse Voltage (DC)=20V, Max Surge Current=5.5A, Number of Elements=1, Number of Pins=2, Number of Terminals=2, Output Current=500mA, Packaging="Tape and Reel", Peak Non-Repetitive Surge Current=5.5A, Peak Reverse Current=250µA, Polarity=Standard, Pricing 1="1=0,23, 10=0,143, 100=0,1257, 500=0,093, 1000=0,08242 (USD)", Radiation Hardening=No, REACH SVHC=Yes, Reverse Standoff Voltage=20V, Reverse Voltage=20V, RoHS=Compliant, Schedule B="8541100070, 8541100070|8541100070|8541100070|8541100070|8541100070", Stock 1=764992, Supplier 1=DigiKey, Termination=SMD/SMT, Voltage Rating (DC)=20V, Width=1.6mm
D2: library part 150060YS75003, "Led, Yellow, 550Mcd, 595Nm Rohs Compliant: Yes", Forward Current=100mA, Forward Voltage=2V, Manufacturer 1="Wurth Elektronik", Max Operating Temperature=100°C, Max Reverse Voltage (DC)=5V, Min Operating Temperature=-40°C, Supplier Part Number 1=732-150060YS75003CT-ND, ComponentLink1Description=https://datasheet.octopart.com:443/150060YS75003-Wurth-Elektronik-datasheet-168473778.pdf?src-supplier=Farnell, ComponentLink1URL=https://datasheet.octopart.com:443/150060YS75003-Wurth-Elektronik-datasheet-168473778.pdf?src-supplier=Farnell, Dominant Wavelength=585nm, Luminous Intensity=550mcd, Manufacturer Part Number 1=150060YS75003, Peak Wavelength=595nm, Pricing 1="1=0,35, 50=0,283, 100=0,249, 250=0,226, 1000=0,19278 (USD)", RoHS=Compliant, Stock 1=10261, Supplier 1=DigiKey, Viewing Angle=140°
D3 D5: library part 150060VS75003, "Led, Bright Green, 100Mcd, 572Nm Rohs Compliant: Yes", Forward Current=100mA, Forward Voltage=2V, Manufacturer 1="Wurth Elektronik", Max Operating Temperature=100°C, Max Reverse Voltage (DC)=5V, Min Operating Temperature=-40°C, Supplier Part Number 1=732-150060VS75003CT-ND, ComponentLink1Description=https://datasheet.octopart.com:443/150060VS75003-Wurth-Elektronik-datasheet-168473758.pdf?src-supplier=Farnell, ComponentLink1URL=https://datasheet.octopart.com:443/150060VS75003-Wurth-Elektronik-datasheet-168473758.pdf?src-supplier=Farnell, Dominant Wavelength=567nm, Height=700µm, Length=1.6mm, Luminous Intensity=100mcd, Manufacturer Part Number 1=150060VS75003, Peak Wavelength=572nm, Pricing 1="1=0,35, 50=0,283, 100=0,249, 250=0,226, 1000=0,19278 (USD)", RoHS=Compliant, Stock 1=1618, Supplier 1=DigiKey, Viewing Angle=140°, Width=800µm
D6: library part 150060RS75003, "SMT Mono-Color Chip LED Waterclear Advance WL-SMCW_0603_ADVANCE", Case/Package=0603, Color=Red, Forward Current=100mA, Forward Voltage=2V, Manufacturer 1="Wurth Elektronik", Max Junction Temperature (Tj)=125°C, Max Operating Temperature=100°C, Max Reverse Voltage (DC)=5V, Min Operating Temperature=-40°C, Power Dissipation=78mW, Supplier Part Number 1=732-150060RS75003CT-ND, ComponentLink1Description=https://datasheet.octopart.com:443/150060RS75003-Wurth-Elektronik-datasheet-170333962.pdf?src-supplier=Farnell, ComponentLink1URL=https://datasheet.octopart.com:443/150060RS75003-Wurth-Elektronik-datasheet-170333962.pdf?src-supplier=Farnell, Dominant Wavelength=615nm, Height=800µm, Luminous Intensity=530mcd, Manufacturer Part Number 1=150060RS75003, Peak Wavelength=630nm, Pricing 1="1=0,35, 50=0,283, 100=0,249, 250=0,226, 1000=0,19278 (USD)", Reverse Voltage=5V, RoHS=Compliant, Stock 1=49005, Supplier 1=DigiKey, Viewing Angle=140°, Wavelength=625nm
F1: "Resettable Fuse, PPTC, 1206 (3216 Metric), 0ZCJ Series, 24 VDC, 500 mA, 1 A, 0.1 s", Case/Package=1206, Case Code (Metric)=3216, Current Rating=100A, Hold Current=500mA, Manufacturer 1="Bel Fuse", Maximum Resistance 1 Hour (R1max)=750m?, Max Operating Temperature=85°C, Max Voltage Rating (DC)=24V, Min Operating Temperature=-40°C, Power Dissipation=600mW, Resistance=150m?, Supplier Part Number 1=5923-0ZCJ0050AF2ECT-ND, Trip Current=1A, Approvals="TUV, UL", Case Code (Imperial)=1206, China RoHS=Compliant, ComponentLink1Description=https://datasheet.octopart.com:443/0ZCJ0050AF2E-Bel-Fuse-datasheet-182141362.pdf?src-supplier=IHS, ComponentLink1URL=https://datasheet.octopart.com:443/0ZCJ0050AF2E-Bel-Fuse-datasheet-182141362.pdf?src-supplier=IHS, ComponentLink2Description=https://datasheet.octopart.com:443/0ZCJ0050AF2E-Bel-Fuse-datasheet-137696978.pdf?src-supplier=Electro+Sonic, ComponentLink2URL=https://datasheet.octopart.com:443/0ZCJ0050AF2E-Bel-Fuse-datasheet-137696978.pdf?src-supplier=Electro+Sonic, ComponentLink3Description=https://datasheet.octopart.com:443/0ZCJ0050AF2E-Bel-Fuse-datasheet-179230428.pdf?src-supplier=Electro+Sonic, ComponentLink3URL=https://datasheet.octopart.com:443/0ZCJ0050AF2E-Bel-Fuse-datasheet-179230428.pdf?src-supplier=Electro+Sonic, ComponentLink4Description=https://datasheet.octopart.com:443/0ZCJ0050AF2E-Bel-Fuse-datasheet-102831406.pdf?src-supplier=Sager+Electronics, ComponentLink4URL=https://datasheet.octopart.com:443/0ZCJ0050AF2E-Bel-Fuse-datasheet-102831406.pdf?src-supplier=Sager+Electronics, ComponentLink5Description=https://datasheet.octopart.com/0ZCJ0050AF2E-Bel-Fuse-datasheet-66464704.pdf, ComponentLink5URL=https://datasheet.octopart.com/0ZCJ0050AF2E-Bel-Fuse-datasheet-66464704.pdf, Contact Plating=Tin, Height=1.2mm, Lead Free="Lead Free", Lifecycle Status=Production, Manufacturer Part Number 1=0ZCJ0050AF2E, Max Current Rating=100A, Mount="Surface Mount", Number of Terminals=2, Packaging="Tape & Reel (TR)", Pricing 1="1=0,28, 5=0,234, 10=0,215, 50=0,1786, 100=0,1649, 250=0,14824, 500=0,13676, 1000=0,12615 (USD)", REACH SVHC=Yes, RoHS=Compliant, Schedule B=8533290000|8533290000|8533290000|8533290000|8533290000|8533290000|8533290000|8533290000|8533290000|8533290000|8533290000|8533290000|8533290000|8533290000|8533290000|8533290000|8533290000|8533290000|8533290000|8533290000|8533290000|8533290000|8533290000|85, Stock 1=130033, Supplier 1=DigiKey, Time to Trip=100ms, Voltage Rating=24V, Width=1.8mm, Working Voltage=24V
J1: "Conn Shrouded Header (4 Sides) HDR 10 POS 2.54mm Solder ST Top Entry Thru-Hole", Color=Black, Contact Resistance=20m?, Current Rating=3A, Insulation Resistance=5G?, Manufacturer 1=Sullins, Max Operating Temperature=105°C, Min Operating Temperature=-40°C, Supplier Part Number 1=S9169-ND, ComponentLink1Description=https://datasheet.octopart.com:443/SBH11-PBPC-D05-ST-BK-Sullins-datasheet-83216131.pdf?src-supplier=IHS, ComponentLink1URL=https://datasheet.octopart.com:443/SBH11-PBPC-D05-ST-BK-Sullins-datasheet-83216131.pdf?src-supplier=IHS, ComponentLink2Description=https://datasheet.octopart.com:443/SBH11-PBPC-D05-ST-BK-Sullins-datasheet-17023157.pdf?src-supplier=Upverter, ComponentLink2URL=https://datasheet.octopart.com:443/SBH11-PBPC-D05-ST-BK-Sullins-datasheet-17023157.pdf?src-supplier=Upverter, ComponentLink3Description=https://datasheet.octopart.com:443/SBH11-PBPC-D05-ST-BK-Sullins-datasheet-145017814.pdf?src-supplier=ODG+(Origin+Data+Global), ComponentLink3URL=https://datasheet.octopart.com:443/SBH11-PBPC-D05-ST-BK-Sullins-datasheet-145017814.pdf?src-supplier=ODG+(Origin+Data+Global), ComponentLink4Description=https://datasheet.octopart.com:443/SBH11-PBPC-D05-ST-BK-Sullins-datasheet-41399312.pdf?src-supplier=Future+Electronics, ComponentLink4URL=https://datasheet.octopart.com:443/SBH11-PBPC-D05-ST-BK-Sullins-datasheet-41399312.pdf?src-supplier=Future+Electronics, ComponentLink5Description=https://datasheet.octopart.com:443/SBH11-PBPC-D05-ST-BK-Sullins-datasheet-12512855.pdf?src-supplier=Future+Electronics, ComponentLink5URL=https://datasheet.octopart.com:443/SBH11-PBPC-D05-ST-BK-Sullins-datasheet-12512855.pdf?src-supplier=Future+Electronics, Connector Type="Male Pin", Contact Gender=Male, Contact Plating=Gold, Lead Free="Lead Free", Lifecycle Status=Production, Manufacturer Part Number 1=SBH11-PBPC-D05-ST-BK, Mount="Through Hole", Number of Pins=10, Number of Positions=10, Number of Rows=2, Pitch=2.54mm, Pricing 1="1=0,24, 10=0,204, 100=0,1737, 500=0,15504, 1000=0,14762, 5000=0,13176, 10000=0,12547 (USD)", REACH SVHC=Yes, RoHS=Compliant, Row Spacing=2.54mm, Stock 1=128871, Supplier 1=DigiKey, Terminal Pitch=2.54mm, Termination=Solder
J3: "Usb Type C Jack IPX7 SMT", Manufacturer 1=GlobTek, Supplier Part Number 1=1939-JACK-USBC-163SMT-4BLS1735-ND, Manufacturer Part Number 1=JACK-USBC-163SMT-4BLS1735, Pricing 1="1=0,76, 10=0,646, 25=0,6056, 50=0,5766, 100=0,5489, 250=0,51452, 500=0,48992, 1000=0,46653, 3000=0,43173 (USD)", Stock 1=4264, Supplier 1=DigiKey
Q1: library part 2N7002H6327XTSA2, "MOSFET N-CH 60V 300MA SOT23-3 N-Channel 60 V 300mA (Ta) 500mW (Ta) Surface Mount PG-SOT23", Case/Package=SOT-23, Continuous Drain Current (ID)=300mA, Drain to Source Breakdown Voltage=60V, Drain to Source Resistance=3?, Gate to Source Voltage (Vgs)=20V, Input Capacitance=13pF, Manufacturer 1=Infineon, Max Junction Temperature (Tj)=150°C, Max Power Dissipation=500mW, Min Operating Temperature=-55°C, Package Quantity=3000, Supplier Part Number 1=2N7002H6327XTSA2CT-ND, Threshold Voltage=2.1V, China RoHS=Compliant, ComponentLink1Description=https://datasheet.octopart.com:443/2N7002H6327XTSA2-Infineon-datasheet-13726707.pdf?src-supplier=ODG+(Origin+Data+Global), ComponentLink1URL=https://datasheet.octopart.com:443/2N7002H6327XTSA2-Infineon-datasheet-13726707.pdf?src-supplier=ODG+(Origin+Data+Global), ComponentLink2Description=https://datasheet.octopart.com:443/2N7002H6327XTSA2-Infineon-datasheet-180049070.pdf?src-supplier=IHS, ComponentLink2URL=https://datasheet.octopart.com:443/2N7002H6327XTSA2-Infineon-datasheet-180049070.pdf?src-supplier=IHS, ComponentLink3Description=https://datasheet.octopart.com:443/2N7002-Infineon-datasheet-180049069.pdf?src-supplier=IHS, ComponentLink3URL=https://datasheet.octopart.com:443/2N7002-Infineon-datasheet-180049069.pdf?src-supplier=IHS, ComponentLink4Description=https://datasheet.octopart.com:443/2N7002H6327XTSA2-Infineon-datasheet-10741796.pdf?src-supplier=Farnell, ComponentLink4URL=https://datasheet.octopart.com:443/2N7002H6327XTSA2-Infineon-datasheet-10741796.pdf?src-supplier=Farnell, ComponentLink5Description=https://datasheet.octopart.com:443/2N7002-H6327-Infineon-datasheet-42562917.pdf?src-supplier=Farnell, ComponentLink5URL=https://datasheet.octopart.com:443/2N7002-H6327-Infineon-datasheet-42562917.pdf?src-supplier=Farnell, ComponentLink6Description=https://datasheet.octopart.com:443/2N7002H6327XTSA2-Infineon-datasheet-82555324.pdf?src-supplier=Farnell, ComponentLink6URL=https://datasheet.octopart.com:443/2N7002H6327XTSA2-Infineon-datasheet-82555324.pdf?src-supplier=Farnell, ComponentLink7Description=https://datasheet.octopart.com:443/2N7002H6327XTSA2-Infineon-datasheet-78731672.pdf?src-supplier=Farnell, ComponentLink7URL=https://datasheet.octopart.com:443/2N7002H6327XTSA2-Infineon-datasheet-78731672.pdf?src-supplier=Farnell, ComponentLink8Description=https://datasheet.octopart.com:443/2N7002-Infineon-datasheet-10733446.pdf?src-supplier=iiiC, ComponentLink8URL=https://datasheet.octopart.com:443/2N7002-Infineon-datasheet-10733446.pdf?src-supplier=iiiC, ComponentLink9Description=http://sigma.octopart.com:80/conflict_mineral_statement/Infineon-company-51.pdf?src-supplier=Compliance+Statements, ComponentLink9URL=http://sigma.octopart.com:80/conflict_mineral_statement/Infineon-company-51.pdf?src-supplier=Compliance+Statements, Contact Plating=Tin, Drain to Source Voltage (Vdss)=60V, Element Configuration=Single, Halogen Free="Halogen Free", Height=1.1mm, Lead Free="Lead Free", Length=2.9mm, Lifecycle Status=Production, Manufacturer Part Number 1=2N7002H6327XTSA2, Max Dual Supply Voltage=60V, Max Operating Temperature=150°C, Min Breakdown Voltage=60V, Mount="Surface Mount", Number of Channels=1, Number of Elements=1, Number of Pins=3, Number of Terminals=3, On-State Resistance=3?, Packaging="Tape & Reel", Power Dissipation=500mW, Pricing 1="1=0,22, 10=0,136, 100=0,084, 500=0,06146, 1000=0,05414 (USD)", Rds On Max=3?, REACH SVHC=Yes, Rise Time=3.3ns, RoHS=Compliant, Schedule B="8541210080, 8541210080|8541210080, 8541210080|8541210080|8541210080, 8541210080|8541210080|8541210080|8541210080", Stock 1=56295, Supplier 1=DigiKey, Turn-Off Delay Time=5.5ns, Turn-On Delay Time=3ns, Width=1.3mm
Q2: "Small Signal Bipolar Transistor, 0.5A I(C), 25V V(BR)CEO, 1-Element, NPN, Silicon", Case/Package=SOT-23, Collector Base Voltage (VCBO)=40V, Collector Emitter Voltage (VCEO)=25V, Emitter Base Voltage (VEBO)=5V, Frequency=150MHz, Manufacturer 1=MCC, Max Collector Current=500mA, Max Operating Temperature=150°C, Max Power Dissipation=300mW, Min Operating Temperature=-55°C, Supplier Part Number 1=353-MMS9013-L-TP-ND, China RoHS=Compliant, ComponentLink1Description=https://datasheet.octopart.com:443/MMS9013-L-TP-MCC-datasheet-179878720.pdf?src-supplier=IHS, ComponentLink1URL=https://datasheet.octopart.com:443/MMS9013-L-TP-MCC-datasheet-179878720.pdf?src-supplier=IHS, ComponentLink2Description=https://datasheet.octopart.com:443/MMS9013-L-TP-MCC-datasheet-101746169.pdf?src-supplier=IHS, ComponentLink2URL=https://datasheet.octopart.com:443/MMS9013-L-TP-MCC-datasheet-101746169.pdf?src-supplier=IHS, hFE Min=120, Lifecycle Status=Production, Manufacturer Part Number 1=MMS9013-L-TP, Mount="Surface Mount", Number of Elements=1, Number of Pins=3, Number of Terminals=3, Packaging="Tape and Reel", Polarity=NPN, Power Dissipation=300mW, Pricing 1="1=0,23, 10=0,139, 100=0,0859, 500=0,06288, 1000=0,05541, 2000=0,0491, 5000=0,04225, 10000=0,038, 50000=0,03056 (USD)", REACH SVHC=Yes, RoHS=Compliant, Stock 1=2828, Supplier 1=DigiKey, Transition Frequency=150MHz
R1 R4 R23 R24: library part RES_AC0402FR-135K1L, "Res Thick Film 0402 5.1K Ohm 1% 0.063W(1/16W) ±100ppm/°C Pad SMD T/R Automotive AEC-Q200", Case/Package=0402, Manufacturer 1="Yageo Group", Manufacturer Part Number 1=AC0402FR-135K1L, Max Operating Temperature=155°C, Min Operating Temperature=-55°C, Power Dissipation=62.5mW, Resistance=5.1k?, Supplier Part Number 1=13-AC0402FR-135K1LCT-ND, Temperature Coefficient=100ppm/°C, TOLERANCE=1%, Voltage Rating=50V, China RoHS=Non-Compliant, ComponentLink1Description=https://datasheet.octopart.com:443/AC0402FR-135K1L-Yageo-datasheet-182189377.pdf?src-supplier=IHS, ComponentLink1URL=https://datasheet.octopart.com:443/AC0402FR-135K1L-Yageo-datasheet-182189377.pdf?src-supplier=IHS, ComponentLink2Description=https://datasheet.octopart.com:443/AC0402FR-135K1L-Yageo-datasheet-83209224.pdf?src-supplier=Upverter, ComponentLink2URL=https://datasheet.octopart.com:443/AC0402FR-135K1L-Yageo-datasheet-83209224.pdf?src-supplier=Upverter, ComponentLink3Description=https://datasheet.octopart.com:443/AC0402FR-135K1L-Yageo-Group-datasheet-189830439.pdf?src-supplier=Future+Electronics, ComponentLink3URL=https://datasheet.octopart.com:443/AC0402FR-135K1L-Yageo-Group-datasheet-189830439.pdf?src-supplier=Future+Electronics, ComponentLink4Description=https://datasheet.octopart.com:443/AC0402FR-135K1L-Yageo-datasheet-166720450.pdf?src-supplier=Future+Electronics, ComponentLink4URL=https://datasheet.octopart.com:443/AC0402FR-135K1L-Yageo-datasheet-166720450.pdf?src-supplier=Future+Electronics, ComponentLink5Description=https://datasheet.octopart.com:443/AC0402FR-135K1L-Yageo-datasheet-164768995.pdf?src-supplier=Future+Electronics, ComponentLink5URL=https://datasheet.octopart.com:443/AC0402FR-135K1L-Yageo-datasheet-164768995.pdf?src-supplier=Future+Electronics, ComponentLink6Description=https://datasheet.octopart.com/AC0402FR-135K1L-Yageo-datasheet-12512238.pdf, ComponentLink6URL=https://datasheet.octopart.com/AC0402FR-135K1L-Yageo-datasheet-12512238.pdf, ComponentLink7Description=http://sigma.octopart.com:80/conflict_mineral_statement/Yageo-company-3.pdf?src-supplier=Compliance+Statements, ComponentLink7URL=http://sigma.octopart.com:80/conflict_mineral_statement/Yageo-company-3.pdf?src-supplier=Compliance+Statements, ComponentLink8Description=http://sigma.octopart.com:80/rohs_statement/Yageo-company-2.pdf?src-supplier=Compliance+Statements, ComponentLink8URL=http://sigma.octopart.com:80/rohs_statement/Yageo-company-2.pdf?src-supplier=Compliance+Statements, Composition="Thick Film", Country of Origin="Mainland China, Taiwan", Export Control Classification Number (ECCN) Code=EAR99, Harmonized Tariff Schedule (HTS) Code=8533.21.00.30, Height=320µm, Introduction Date=2012-04-10, Lifecycle Status=Production, Mount="Surface Mount", Number of Terminals=2, Packaging="Tape & Reel", Power Rating=62.5mW, Pricing 1="1=0,1, 10=0,023, 25=0,0164, 50=0,0132, 100=0,0107, 250=0,00824, 500=0,00686, 1000=0,00577, 5000=0,00407 (USD)", REACH SVHC=Yes, RoHS=Compliant, Stock 1=118666, Supplier 1=DigiKey, Width=500µm, Working Voltage=50V
R2 R5 R6 R7: library part RES_AC0402FR-7W22RL, "125mW Thick Film Resistors ±100ppm/? ±1% 22? 0402 Chip Resistor - Surface Mount ROHS", Case/Package=0402, Manufacturer 1="Yageo Group", Manufacturer Part Number 1=AC0402FR-7W22RL, Max Operating Temperature=155°C, Min Operating Temperature=-55°C, Power Dissipation=125mW, Resistance=22?, Supplier Part Number 1=13-AC0402FR-7W22RLCT-ND, Temperature Coefficient=100ppm/°C, TOLERANCE=1%, Voltage Rating=50V, Working Voltage=75V, China RoHS=Non-Compliant, ComponentLink1Description=https://datasheet.octopart.com:443/AC0402FR-7W22RL-Yageo-datasheet-182189377.pdf?src-supplier=IHS, ComponentLink1URL=https://datasheet.octopart.com:443/AC0402FR-7W22RL-Yageo-datasheet-182189377.pdf?src-supplier=IHS, ComponentLink2Description=https://datasheet.octopart.com:443/AC0402FR-7W22RL-Yageo-datasheet-83209224.pdf?src-supplier=Upverter, ComponentLink2URL=https://datasheet.octopart.com:443/AC0402FR-7W22RL-Yageo-datasheet-83209224.pdf?src-supplier=Upverter, ComponentLink3Description=https://datasheet.octopart.com:443/AC0402FR-7W22RL-Yageo-datasheet-178509465.pdf?src-supplier=Farnell, ComponentLink3URL=https://datasheet.octopart.com:443/AC0402FR-7W22RL-Yageo-datasheet-178509465.pdf?src-supplier=Farnell, ComponentLink4Description=https://datasheet.octopart.com:443/AC0402FR-7W22RL-Yageo-datasheet-166720450.pdf?src-supplier=Future+Electronics, ComponentLink4URL=https://datasheet.octopart.com:443/AC0402FR-7W22RL-Yageo-datasheet-166720450.pdf?src-supplier=Future+Electronics, ComponentLink5Description=https://datasheet.octopart.com:443/AC0402FR-7W22RL-Yageo-datasheet-151884373.pdf?src-supplier=Future+Electronics, ComponentLink5URL=https://datasheet.octopart.com:443/AC0402FR-7W22RL-Yageo-datasheet-151884373.pdf?src-supplier=Future+Electronics, ComponentLink6Description=https://datasheet.octopart.com:443/AC0402FR-7W22RL-Yageo-Group-datasheet-164768995.pdf?src-supplier=ODG+(Origin+Data+Global), ComponentLink6URL=https://datasheet.octopart.com:443/AC0402FR-7W22RL-Yageo-Group-datasheet-164768995.pdf?src-supplier=ODG+(Origin+Data+Global), ComponentLink7Description=https://datasheet.octopart.com/AC0402FR-7W22RL-Yageo-datasheet-12512238.pdf, ComponentLink7URL=https://datasheet.octopart.com/AC0402FR-7W22RL-Yageo-datasheet-12512238.pdf, ComponentLink8Description=http://sigma.octopart.com:80/conflict_mineral_statement/Yageo-company-3.pdf?src-supplier=Compliance+Statements, ComponentLink8URL=http://sigma.octopart.com:80/conflict_mineral_statement/Yageo-company-3.pdf?src-supplier=Compliance+Statements, ComponentLink9Description=http://sigma.octopart.com:80/rohs_statement/Yageo-company-2.pdf?src-supplier=Compliance+Statements, ComponentLink9URL=http://sigma.octopart.com:80/rohs_statement/Yageo-company-2.pdf?src-supplier=Compliance+Statements, Composition="Thick Film", Country of Origin="Mainland China, Taiwan", Export Control Classification Number (ECCN) Code=EAR99, Harmonized Tariff Schedule (HTS) Code=8533.21.00.30, Height=320µm, Introduction Date=2017-06-20, Lifecycle Status=Production, Mount="Surface Mount", Number of Terminals=2, Packaging="Tape & Reel", Power Rating=125mW, Pricing 1="1=0,1, 10=0,006, 25=0,0056, 50=0,0052, 100=0,005 (USD)", REACH SVHC=Yes, RoHS=Compliant, Stock 1=18426, Supplier 1=DigiKey, Width=500µm
R3 R11 R14: library part RES_AC0402FR-7W100KL, "Res Thick Film 0402 100K Ohm 1% 0.125W(1/8W) ±100ppm/°C Pad SMD T/R Automotive AEC-Q200", Case/Package=0402, Manufacturer 1="Yageo Group", Manufacturer Part Number 1=AC0402FR-7W100KL, Max Operating Temperature=155°C, Min Operating Temperature=-55°C, Power Dissipation=125mW, Resistance=100k?, Supplier Part Number 1=13-AC0402FR-7W100KLCT-ND, Temperature Coefficient=100ppm/°C, TOLERANCE=1%, Voltage Rating=50V, Working Voltage=75V, China RoHS=Non-Compliant, ComponentLink1Description=https://datasheet.octopart.com:443/AC0402FR-7W100KL-Yageo-datasheet-182189377.pdf?src-supplier=IHS, ComponentLink1URL=https://datasheet.octopart.com:443/AC0402FR-7W100KL-Yageo-datasheet-182189377.pdf?src-supplier=IHS, ComponentLink2Description=https://datasheet.octopart.com:443/AC0402FR-7W100KL-Yageo-datasheet-83209224.pdf?src-supplier=Upverter, ComponentLink2URL=https://datasheet.octopart.com:443/AC0402FR-7W100KL-Yageo-datasheet-83209224.pdf?src-supplier=Upverter, ComponentLink3Description=https://datasheet.octopart.com:443/AC0402FR-7W100KL-Yageo-datasheet-178509465.pdf?src-supplier=Newark, ComponentLink3URL=https://datasheet.octopart.com:443/AC0402FR-7W100KL-Yageo-datasheet-178509465.pdf?src-supplier=Newark, ComponentLink4Description=https://datasheet.octopart.com:443/AC0402FR-7W100KL-Yageo-Group-datasheet-189830439.pdf?src-supplier=Future+Electronics, ComponentLink4URL=https://datasheet.octopart.com:443/AC0402FR-7W100KL-Yageo-Group-datasheet-189830439.pdf?src-supplier=Future+Electronics, ComponentLink5Description=https://datasheet.octopart.com:443/AC0402FR-7W100KL-Yageo-datasheet-166720450.pdf?src-supplier=Future+Electronics, ComponentLink5URL=https://datasheet.octopart.com:443/AC0402FR-7W100KL-Yageo-datasheet-166720450.pdf?src-supplier=Future+Electronics, ComponentLink6Description=https://datasheet.octopart.com:443/AC0402FR-7W100KL-Yageo-datasheet-151884373.pdf?src-supplier=Future+Electronics, ComponentLink6URL=https://datasheet.octopart.com:443/AC0402FR-7W100KL-Yageo-datasheet-151884373.pdf?src-supplier=Future+Electronics, ComponentLink7Description=https://datasheet.octopart.com:443/AC0402FR-7W100KL-Yageo-datasheet-137699919.pdf?src-supplier=Future+Electronics, ComponentLink7URL=https://datasheet.octopart.com:443/AC0402FR-7W100KL-Yageo-datasheet-137699919.pdf?src-supplier=Future+Electronics, ComponentLink8Description=https://datasheet.octopart.com:443/AC0402FR-7W100KL-Yageo-Group-datasheet-164768995.pdf?src-supplier=ODG+(Origin+Data+Global), ComponentLink8URL=https://datasheet.octopart.com:443/AC0402FR-7W100KL-Yageo-Group-datasheet-164768995.pdf?src-supplier=ODG+(Origin+Data+Global), ComponentLink9Description=https://datasheet.octopart.com:443/AC0402FR-7W100KL-Yageo-Group-datasheet-159083007.pdf?src-supplier=HQonline, ComponentLink9URL=https://datasheet.octopart.com:443/AC0402FR-7W100KL-Yageo-Group-datasheet-159083007.pdf?src-supplier=HQonline, ComponentLink10Description=https://datasheet.octopart.com/AC0402FR-7W100KL-Yageo-datasheet-12512238.pdf, ComponentLink10URL=https://datasheet.octopart.com/AC0402FR-7W100KL-Yageo-datasheet-12512238.pdf, ComponentLink11Description=http://sigma.octopart.com:80/conflict_mineral_statement/Yageo-company-3.pdf?src-supplier=Compliance+Statements, ComponentLink11URL=http://sigma.octopart.com:80/conflict_mineral_statement/Yageo-company-3.pdf?src-supplier=Compliance+Statements, ComponentLink12Description=http://sigma.octopart.com:80/rohs_statement/Yageo-company-2.pdf?src-supplier=Compliance+Statements, ComponentLink12URL=http://sigma.octopart.com:80/rohs_statement/Yageo-company-2.pdf?src-supplier=Compliance+Statements, Composition="Thick Film", Country of Origin="Mainland China, Taiwan", Export Control Classification Number (ECCN) Code=EAR99, Harmonized Tariff Schedule (HTS) Code=8533.21.00.30, Height=320µm, Introduction Date=2017-06-20, Lifecycle Status=Production, Mount="Surface Mount", Number of Terminals=2, Packaging="Tape & Reel", Power Rating=125mW, Pricing 1="1=0,1, 10=0,006, 25=0,0056, 50=0,0052, 100=0,005 (USD)", REACH SVHC=Yes, RoHS=Compliant, Stock 1=106788, Supplier 1=DigiKey, Width=500µm